# Altium PCB Arduino_Display_PCB1.PcbDoc
Units mil, origin at the board's own origin, x right, y up, seen from the top; angles counter-clockwise.
Board outline 2395 x 2300 mil, 2 copper layers (Top Layer, Bottom Layer); 41 components, 52 nets, 169 pads, 56 vias.
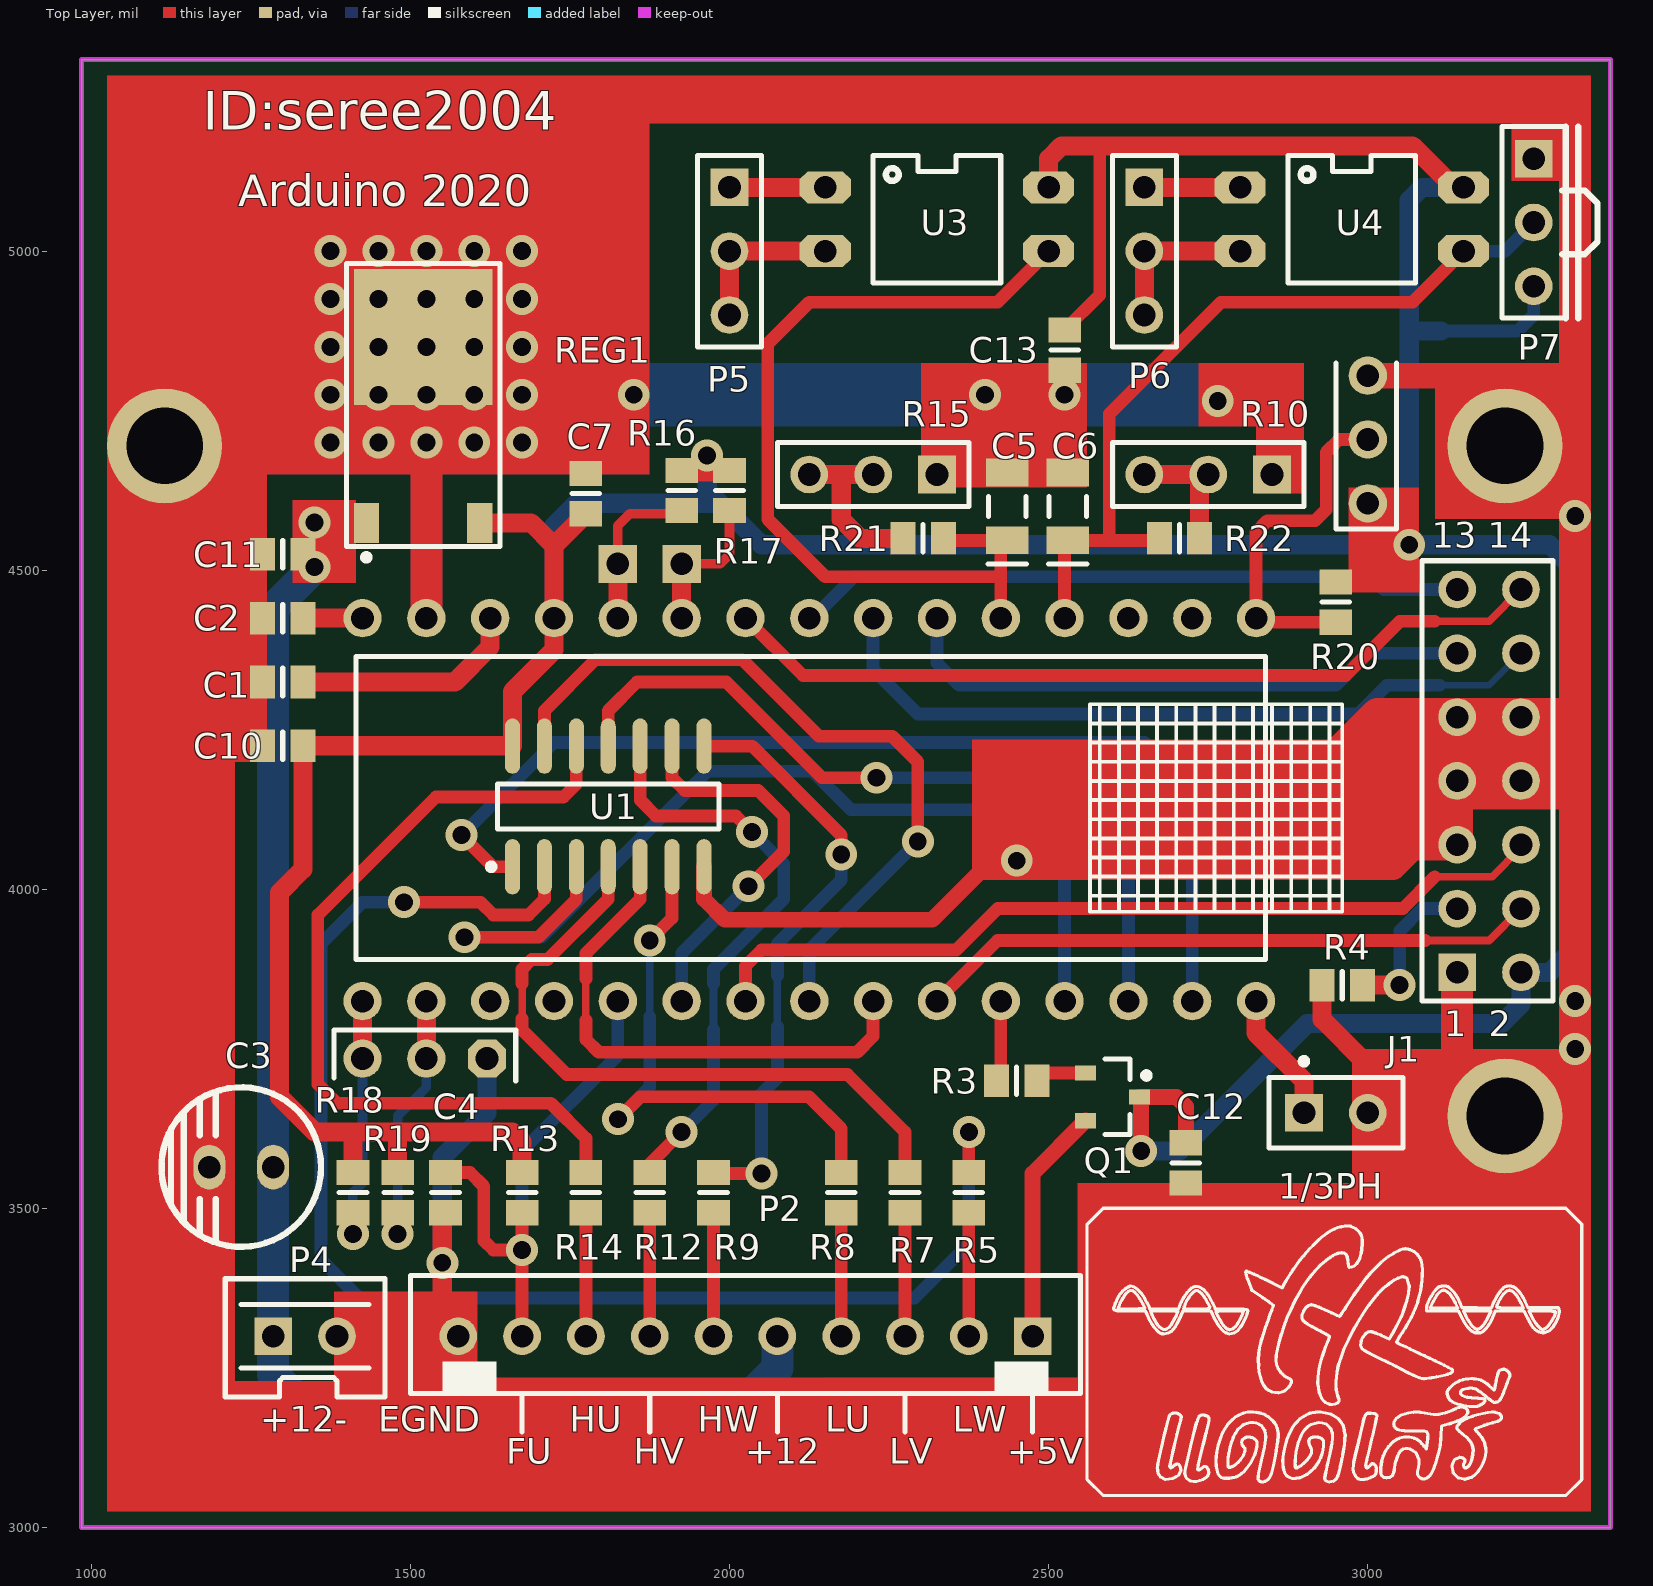
[diagram p0: Top Layer view]
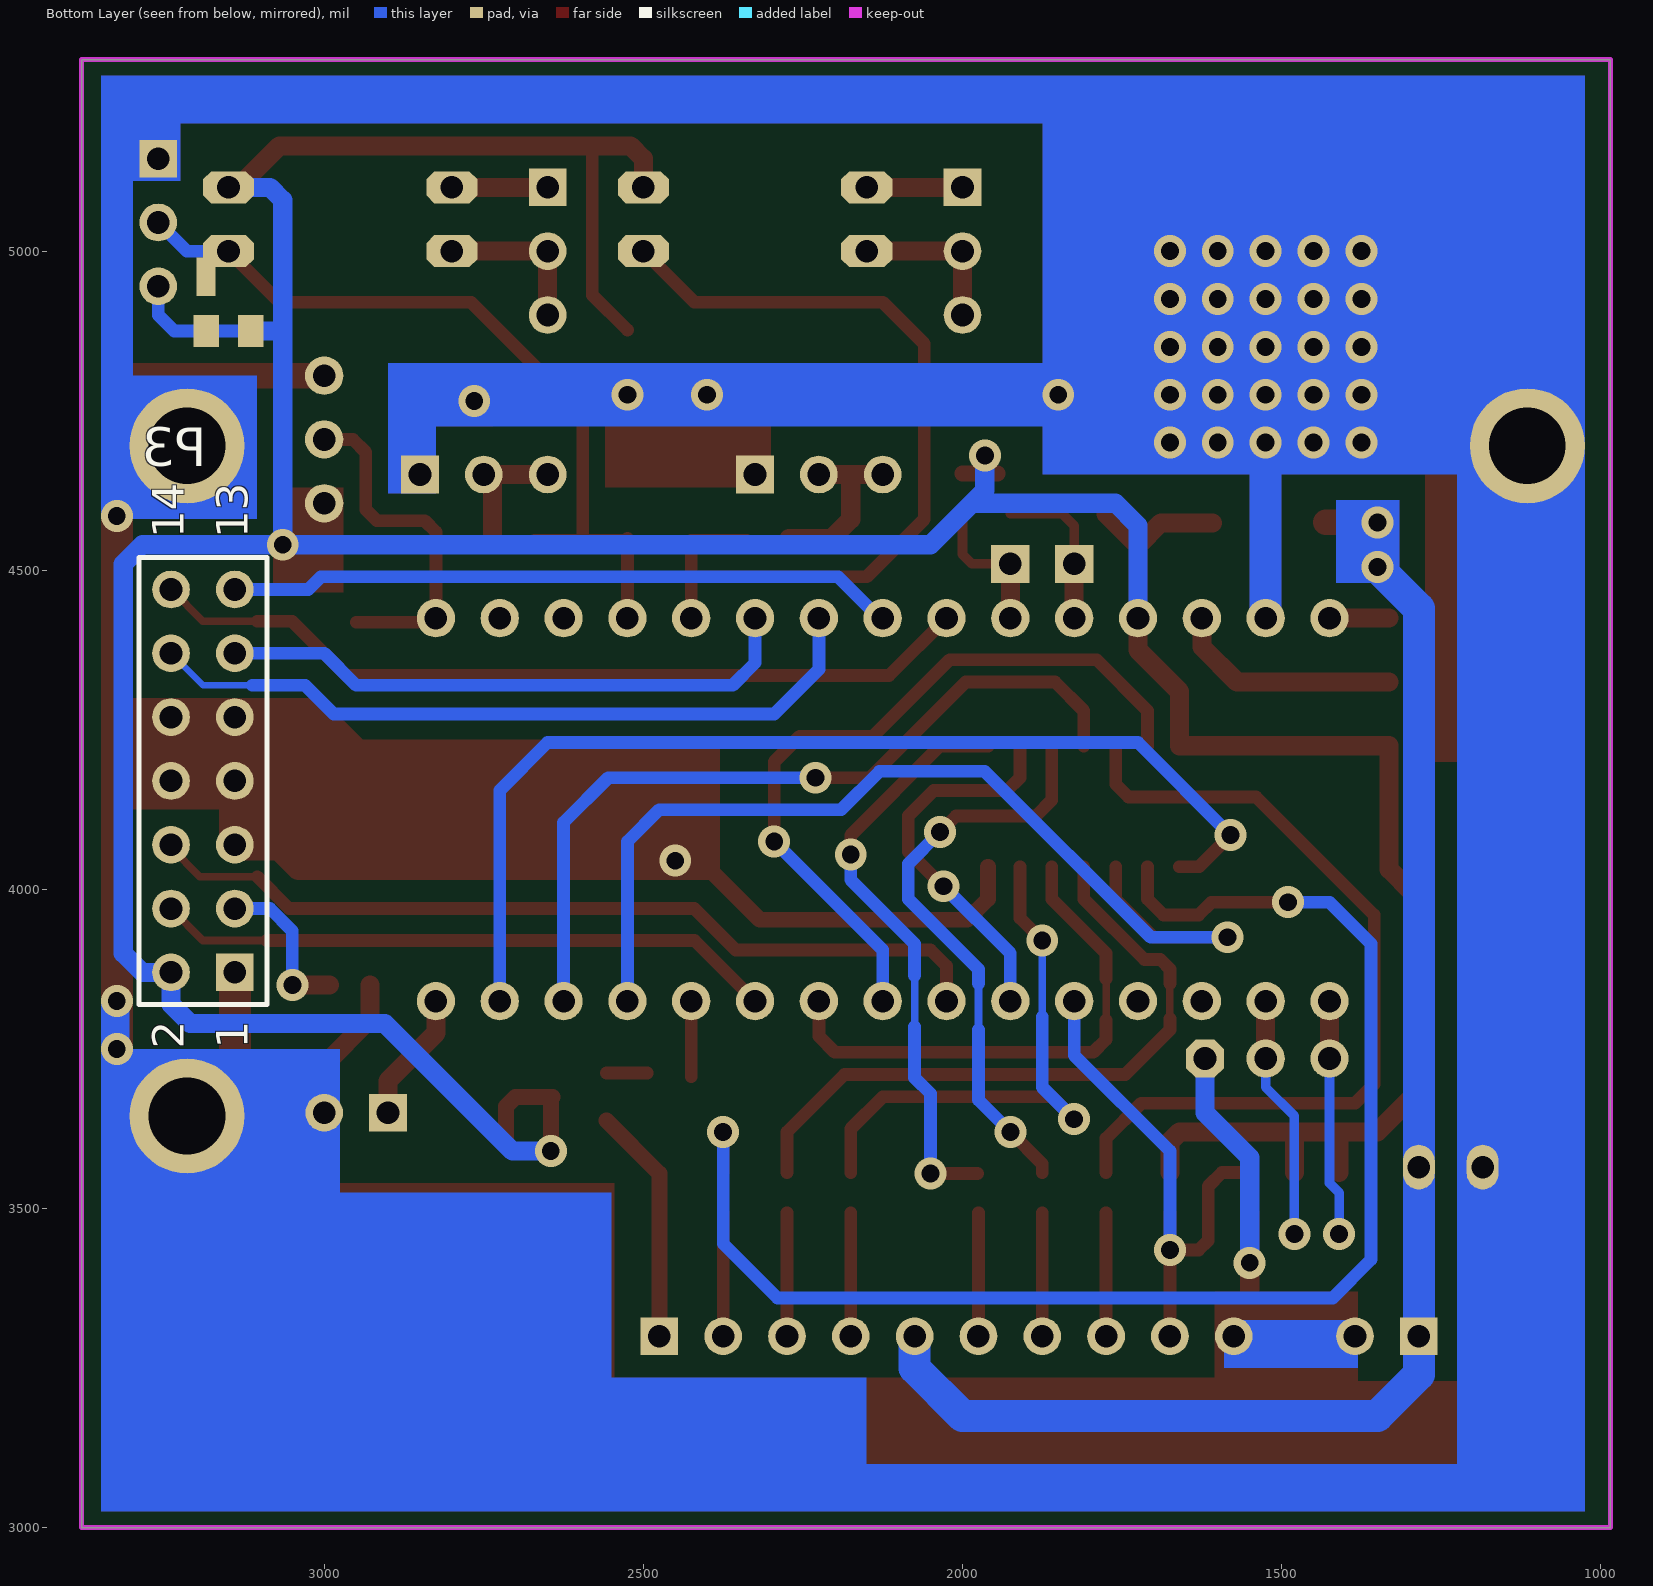
[diagram p1: Bottom Layer view, seen from below]

## Layer stack, top to bottom
Top Solder: solder mask 0.4, Solder Resist, Dk 3.5
Top Layer: signal copper 1.4
Dielectric 1: dielectric 12.6, FR-4, Dk 4.8
Bottom Layer: signal copper 1.4
Bottom Solder: solder mask 0.4, Solder Resist, Dk 3.5

## Board outline
985,3000 3380,3000 3380,5300 985,5300

## Design rules (kind name [scope] priority, off if disabled: settings)
Clearance [All] p1: gap=10
PolygonConnect [All] p1: connectstyle=Direct reliefconductorwidth=10 reliefentries=4 polygonreliefangle="90 Angle" airgapwidth=10
RoutingVias [All] p1: holewidth=28 width=50 viastyle="Through Hole" minholewidth=28 minwidth=50 maxholewidth=28 maxwidth=50
SolderMaskExpansion [All] p1: expansion=4
UnpouredPolygon [All] p1: allowunpoured=FALSE
Width [All] p1: maxlimit=100 minlimit=10 preferedwidth=20 minimp=50.000000 maximp=50.000000 favimp=50.000000
29 further rules are at their usual default settings.

## Classes and differential pairs
component class Arduino_SPWM_Sheet1: C1 C2 C3 J1 P2 P4 Q1 R3 R4 R5 R7 R8 R9 R12 R13 R14

## Components (designator, comment, footprint, x,y, rotation, side; value= is the part's Value field where it differs from the comment)
C1 "10PF" 6-0805_L 1300,4325 r0 top
C2 "100nF" 6-0805_L 1300,4425 r180 top
C3 "100uF" CAN_100 1235,3565 r0 top
C4 "100nF" 6-0805_L 1555,3525 r270 top (schematic designator C2)
C5 "10uF/16" C1206 2435,4600 r90 top (schematic designator C2)
C6 "10uF/16" C1206 2530,4600 r90 top (schematic designator C2)
C7 "100nF" 6-0805_L 1775,4620 r270 top (schematic designator C2)
C10 "100nF" 6-0805_L 1300,4225 r180 top (schematic designator C2)
C11 "100nF" 6-0805_L 1300,4525 r180 top (schematic designator C2)
C12 "100nF" 6-0805_L 2715,3571.5 r90 top (schematic designator C2)
C13 "100nF" 6-0805_L 2525,4845 r270 top (schematic designator C2)
J1 "LED0" PIN2 2900,3650 r0 top (schematic designator D2)
P2 "Header 10" HDR1X10 2475,3300 r180 top
P3 "LCD" HDR2X7 3140,3870 r90 bottom
P4 "Header 2" HDR1X2 1285,3300 r0 top
P5 "Header 2" HDR1X3 2000,5100 r270 top (schematic designator P4)
P6 "Header 2" HDR1X3 2650,5100 r270 top (schematic designator P4)
P7 "Header 2" HDR1X3 3260,5145 r270 top (schematic designator P4)
Q1 "SS8050(Y1)" SOT23_L 2600,3675 r0 top
R3 "1K" 6-0805_L 2450,3700 r180 top
R4 "1.8K" 6-0805_L 2960,3850 r180 top (schematic designator R2)
R5 "220R" 6-0805_L 2375,3525 r90 top
R7 "220R" 6-0805_L 2275,3525 r90 top
R8 "220R" 6-0805_L 2175,3525 r90 top
R9 "220R" 6-0805_L 1975,3525 r90 top
R10 "VR50K" HDR1X3 2850,4650 r180 top
R12 "220R" 6-0805_L 1875,3525 r90 top
R13 "4.7K" 6-0805_L 1675,3525 r270 top
R14 "220R" 6-0805_L 1775,3525 r90 top
R15 "VR50K" HDR1X3 2325,4650 r180 top (schematic designator R10)
R16 "4.7K" 6-0805_L 1925,4625 r270 top (schematic designator R13)
R17 "4.7K" 6-0805_L 2000,4625 r270 top (schematic designator R13)
R18 "4.7K" 6-0805_L 1410,3525 r270 top (schematic designator R13)
R19 "4.7K" 6-0805_L 1480,3525 r270 top (schematic designator R13)
R20 "4.7K" 6-0805_L 2950,4450 r270 top (schematic designator R13)
R21 "68K" 6-0805_L 2303.5,4550 r180 top (schematic designator R13)
R22 "68K" 6-0805_L 2705,4550 r0 top (schematic designator R13)
REG1 "7805" TO-252-2 1520,4720 r0 top
U1 "74HC04" SO14_N 1810,4130 r90 top
U3 "EL817" OPTO4 2325,5050 r0 top
U4 "EL817" OPTO4 2975,5050 r0 top (schematic designator U3)

## Footprints (in the part's own frame and the unit in brackets; to place one, negate y for a bottom-side part, rotate by r counter-clockwise, add the part's x,y. Pads: shape width x height; smd on the part's side, far side on the other; paste and mask are expansions set on the pad)
6-0805_L [mm] "Chip Resistor, Body 2.0x1.2mm, IPC High Density"
  rect 1x1.3 smd: 1(-0.8,0) 2(0.8,0)
  silkscreen extent 0,-0.55 0,0.55, body extent -1.07,-0.7 1.07,0.7, height 0.7
C1206 [mm] "Chip Capacitor, Body 3.2x1.6mm, IPC High Density"
  rect 1.1x1.7 smd: 1(-1.35,0) 2(1.35,0)
  silkscreen extent -0.4,-0.75 0.4,0.75, body extent -1.7,-0.9 1.7,0.9, height 1.3
CAN_100 [mil]
  oval 50x70 hole 35.43: 1(50,0) 2(-50,0)
  silkscreen extent -125,-125 125,125
HDR1X2 [mm] "Connector; Header; 2 Position"
  rect 1.5x1.5 hole 0.9: 1(0,0)
  round 1.5 hole 0.9: 2(2.54,0)
  silkscreen extent -1.27,-1.27 3.81,1.27
HDR1X3 [mm] "Connector; Header; 3 Position"
  rect 1.5x1.5 hole 0.9: 1(0,0)
  round 1.5 hole 0.9: 2(2.54,0) 3(5.08,0)
  silkscreen extent -1.27,-1.27 6.35,1.27
HDR1X10 [mm] "Connector; Header; 10 Position"
  rect 1.5x1.5 hole 0.9: 1(0,0)
  round 1.5 hole 0.9: 2(2.54,0) 3(5.08,0) 4(7.62,0) 5(10.16,0) 6(12.7,0) 7(15.24,0) 8(17.78,0) 9(20.32,0) 10(22.86,0)
HDR2X7 [mm] "Connector; Header; 7x2 Position"
  rect 1.5x1.5 hole 0.9: 1(0,0)
  round 1.5 hole 0.9: 2(0,2.54) 3(2.54,0) 4(2.54,2.54) 5(5.08,0) 6(5.08,2.54) 7(7.62,0) 8(7.62,2.54) 9(10.16,0) 10(10.16,2.54) 11(12.7,0) 12(12.7,2.54) 13(15.24,0) 14(15.24,2.54)
  silkscreen extent -1.27,-1.27 16.51,3.81
OPTO4 [mil]
  oct 80x50 hole 35.43: 1(-175,50) 2(-175,-50) 3(175,-50) 4(175,50)
  silkscreen extent -100,-100 100,100
PIN2 [mm] "Photosensitive Diode; 2 Leads"
  rect 1.5x1.5 hole 0.9: 1(0,0)
  round 1.5 hole 0.9: 2(2.54,0)
  silkscreen extent -1.4,-1.4 3.94,2.17
SO14_N [mm]
  oval 2.2x0.6 smd: 1(-2.4,3.81) 2(-2.4,2.54) 3(-2.4,1.27) 4(-2.4,0) 5(-2.4,-1.27) 6(-2.4,-2.54) 7(-2.4,-3.81) 8(2.4,-3.81) 9(2.4,-2.54) 10(2.4,-1.27) 11(2.4,0) 12(2.4,1.27) 13(2.4,2.54) 14(2.4,3.81)
  silkscreen extent -2.52,-4.4 0.9,4.78
SOT23_L [mm] "SOT23, 3-Leads, Body 2.9x1.3mm, Pitch 0.95mm, Lead Span 2.3mm - Reverse Pinning, IPC High Density"
  rect 0.85x0.6 smd: 1(1.075,0) 2(-1.075,-0.95) 3(-1.075,0.95)
  silkscreen extent -0.3,-1.5 1.48,1.5, body extent -0.7,-1.5 0.7,1.5, height 1.1
TO-252-2 [mm]
  rect 1x1.6 smd: 1(-2.25,-3.7) 3(2.25,-3.7)
  rect 5.5x5.4 smd: 2(0,3.7)
  silkscreen extent -3.05,-5.2 3.05,6.62

## Part data
C1 C2 C4 C5 C6 C7 C10 C11 C12 C13: library part Cap, "Capacitor"
C3: library part "Cap Pol1", "Capacitor (Radial)"
J1: "Typical INFRARED GaAs LED"
P2: "Header, 10-Pin"
P4 P5 P6 P7: "Header, 2-Pin"
Q1: library part NPN, "NPN Bipolar Transistor"
R3 R4 R5 R7 R8 R9 R12 R13 R14 R16 R17 R18 R19 R20 R21 R22: library part Res1, "Resistor"
R10 R15: library part RPot, "Potentiometer"
U3 U4: library part Optoisolator1, "4-Pin Phototransistor Optocoupler"

## Free pads (board coordinates)
  round 60 hole 35.43: 0(1425,3735) 0(2825,3825) 0(3000,4805) 1(1525,3735) 1(2725,3825) 1(3000,4605) 2(2625,3825) 2(3000,4705) 3(2525,3825) 4(2425,3825) 5(2325,3825) 7(2825,4425) 8(2725,4425) 9(2625,4425) 10(2525,4425) 11(2425,4425) 12(2325,4425) 13(2225,4425) 14(2125,4425) 15(2025,4425) 16(1925,4425) 17(1825,4425) 18(1725,4425) 19(1625,4425) 20(1525,4425) 21(1425,4425) 22(1525,3825) 23(1625,3825) 24(1725,3825) 25(1825,3825) 26(1925,3825) 27(2025,3825) 28(2125,3825) 29(2225,3825) 30(1425,3825)
  rect 40x50 smd far side: 0(3185,4875) 1(3115,4875)
  round 180 hole 120: 0(3215,4695) 1(1115,4695) 2(3215,3645)
  rect 60x60 hole 35.43: 2(1825,4510) 3(1925,4510)
  rect 30x60 smd far side: 2(3185,4960)
  oct 60x60 hole 35.43: 3(1620,3735)

## Via types
v1: diameter 50, hole 28, Top Layer to Bottom Layer, 56 vias

## Nets (pads, with @x,y where several pads share a name; then routed paths per layer and width w, separated by ;. In a path a pad name is that pad's centre, name@x,y a point inside that pad or via, vN(x,y) a via of type N, cw(c..) or ccw(c..) an arc to the next point about the centre after c; other vN are vias at no path point)
+12V: C3.1 C11.1 P2.5 P4.1 REG1.1 | length 2271.6
  Top Layer w30: REG1.1@1430.75,4575 REG1.1
  Top Layer w40: v1(1350,4575) REG1.1@1430.75,4575
  Bottom Layer w50: v1(1350,4505) 1285,4440 C3.1 P4.1 1285,3240 1350,3175 2000,3175 2075,3250 P2.5
D3_1: 
D4_1: 
GND: C1.1 C2.2 C3.2 C4.2 C5.2 C6.2 C7.1 C10.2 C11.2 C12.1 C13.2 J1.2 P2.10 P3.1 P3.5 P3.7 P3.8 P3.9 P3.10 P4.2 P7.1 pad.0@3000,4805 pad.0@3215,4695 pad.1@1115,4695 pad.2@3215,3645 pad.3@1620,3735 pad.20 R4.2 R10.1 R15.1 REG1.2 U1.7 | length 2542
  Top Layer w20: 1263.5,4798.5 1295,4830 REG1.2@1484.33,4830
  Top Layer w25: U1.7 1960,3985 1992.5,3952.5 2317.5,3952.5 2400,4035
  Top Layer w30: 1550,3350 v1(1550,3415) C4.2@1550,3493.5 ; R4.2 2928.5,3796.5 3000,3725
  Top Layer w40: 3010,4035 3040,4035 3075,4070
  Top Layer w50: pad.20 v1(1525,4700) v1@1525,4715 ; 2952.5,4212.5 3015,4275 ; 2995,4070 P3.5 P3.7 ; 3140,3725 P3.1
  Bottom Layer w30: v1(1550,3415) 1550,3580 1620,3650 pad.3@1620,3735
  Bottom Layer w50: pad.20 v1(1525,4700)
  other v1: 3325,3750 3325,3825 2450,4045 3325,4585 1375,4700 1450,4700 1600,4700 1675,4700 2765,4765 1375,4775 1450,4775 1525,4775 1600,4775 1675,4775 1850,4775 2400,4775 2525,4775 1375,4850 1450,4850 1525,4850 1600,4850 1675,4850 1375,4925 1450,4925 1525,4925 1600,4925 1675,4925 1375,5000 1450,5000 1525,5000 1600,5000 1675,5000
Net*1_4: C4.1 P2.9 pad.25 R13.2 | length 865.8
  Top Layer w20: C4.1 1593.5,3556.5 1615,3535 1615,3450 1630,3435 v1(1675,3435) ; P2.9 v1(1675,3435) ; R13.2 v1(1675,3435)
  Bottom Layer w20: v1(1675,3435) 1675,3590 1825,3740 pad.25
Net*1_5: pad.26 U1.9 | length 606
  Top Layer w20: U1.9 1910,4175 1930,4155 2045,4155 2085,4115 2085,4059.29 2030.71,4005 v1(2030,4005)
  Bottom Layer w20: pad.26 1925,3900 v1(2030,4005)
Net*1_6: P3.6 pad.27 | length 1351.6
  Top Layer w10: P3.6@3240,4065 P3.6
  Top Layer w12: 3105,4020 3195,4020 P3.6@3240,4065
  Top Layer w20: pad.27 2025,3880 2050,3905 2355.21,3905 2420.21,3970 3055,3970 3105,4020
Net*1_7: pad.28 U1.13 | length 1185.3
  Top Layer w20: U1.13 1710,4280 1790,4360 2020,4360 2140,4240 2255,4240 2295,4200 v1(2295,4075)
  Bottom Layer w20: pad.28 2125,3905 v1(2295,4075)
Net*1_8: pad.29 U1.5 | length 829.4
  Top Layer w12: 1775,3795 1775,3860
  Top Layer w20: 1775,3795 1775,3765 1795,3745 2200,3745 2225,3770 pad.29 ; 1775,3860 1775,3900 1860,3985 U1.5
Net*1_9: P3.4 pad.5 | length 975.1
  Top Layer w12: 3090,3920 3190,3920 P3.4
  Top Layer w20: pad.5 2420,3920 3090,3920
Net*1_10: pad.4 R3.2 | length 118.5
  Top Layer w20: R3.2@2425,3706.5 pad.4
Net*1_11: pad.3@2525,3825 U1.3 | length 1593.9
  Top Layer w20: v1(1585,3925) 1700.5,3925 1760,3984.5 U1.3
  Bottom Layer w20: v1(1585,3925) 1705,3925 1965,4185 2130,4185 2190,4125 2475,4125 2525,4075 pad.3@2525,3825
Net*1_12: pad.2@2625,3825 U1.11 | length 1260.3
  Top Layer w20: U1.11 1810,4280 1855,4325 1995,4325 2145,4175 v1(2230,4175)
  Bottom Layer w20: v1(2230,4175) 2555,4175 2625,4105 pad.2@2625,3825
Net*1_13: pad.1@2725,3825 U1.1 | length 1666.6
  Top Layer w20: v1(1580,4085) 1629.49,4035.51 U1.1
  Bottom Layer w20: v1(1580,4085) 1725,4230 2650,4230 2725,4155 pad.1@2725,3825
Net*1_14: J1.1 pad.0@2825,3825 | length 206.1
  Top Layer w30: pad.0@2825,3825 2825,3775 2900,3700 J1.1
Net*1_15: pad.2@3000,4705 pad.7 R20.2 | length 541.3
  Top Layer w20: pad.7 2825,4560 2842.5,4577.5 2917.5,4577.5 2935,4595 2935,4685 2955,4705 pad.2@3000,4705 ; pad.7@2831.5,4418.5 R20.2
Net*1_18: C6.1 P7.2 pad.2@3185,4960 pad.10 R22.1 U4.3 | length 1252.8
  Top Layer w20: pad.10 C6.1@2525,4550 ; C6.1 2595,4546.85 ; R22.1@2670.35,4546.85 2595,4546.85 ; U4.3 3070,4920 2770,4920 2595,4745 2595,4546.85
  Bottom Layer w20: U4.3 3215,5000 P7.2
Net*1_19: C5.1 pad.11 R21.1 U3.3 | length 1386
  Top Layer w20: R21.1@2338.15,4546.85 2425,4546.85 2425,4490 ; pad.11 2425,4490 ; U3.3 2420,4920 2125,4920 2060,4855 2060,4580 2150,4490 2425,4490
Net*1_20: P3.11 pad.12 | length 925.2
  Bottom Layer w20: pad.12@2330,4425 pad.12 2325,4355 2360,4320 2950,4320 3000,4370 P3.11
Net*1_21: P3.12 pad.13 | length 1163.3
  Bottom Layer w10: 3112.89,4320 3190,4320 P3.12
  Bottom Layer w20: pad.13 2225,4345 2295,4275 2985,4275 3030,4320 3112.89,4320
Net*1_22: P3.13 pad.14 | length 1050.2
  Bottom Layer w20: pad.14 2130,4425 2195,4490 3005,4490 3025,4470 P3.13
Net*1_23: P3.14 pad.15 | length 1308.2
  Top Layer w12: 3105,4420 3190,4420 P3.14
  Top Layer w20: pad.15 2115,4335 2965,4335 3050,4420 3105,4420
Net*1_26: C7.2 C10.1 C12.2 C13.1 P3.2 P7.3 pad.0@3185,4875 pad.1@3000,4605 pad.1@3115,4875 pad.18 Q1.1 R13.1 R16.1 R17.1 R18.1 R19.1 R20.1 REG1.3 U1.14 U3.4 U4.4 | length 7521.3
  Top Layer w20: C13.1 2580,4931.5 2580,5165
  Top Layer w25: R16.1@1945,4651.5 R17.1@2000,4651.5 ; Q1.1 2700,3675 2715,3660 C12.2 ; v1(2645,3590) Q1.1@2645,3672.32
  Top Layer w30: R18.1 1410,3615 ; R19.1 1480,3615 ; REG1.3 1689.17,4574.33 1725,4538.5 ; U1.14 1660,4310 1725,4375 pad.18 1725,4538.5 ; U1.14@1660,4225 C10.1 1331.5,4031.5 1295,3995 1295,3675 1350,3620 1660,3620 1675,3605 R13.1 ; C7.2 1725,4538.5 ; U3.4 2500,5145 2520,5165 3070,5165 3135,5100 U4.4
  Bottom Layer w20: pad.1@3115,4875 3185,4875 3235,4875 3260,4900 P7.3
  Bottom Layer w30: pad.18 1725,4570 1760,4605 1985,4605 ; v1(1965,4680) 1965,4625 1985,4605 ; v1(2645,3590) 2705,3590 2905,3790 3210,3790 3240,3820 P3.2 3285,3870 3315,3900 3315,4510 3285,4540 v1(3065,4540) ; pad.1@3115,4875 3070,4875 3065,4880 ; U4.4 3085,5100 3065,5080 3065,4880 ; 1985,4605 2050,4540 v1(3065,4540) ; v1(3065,4540) 3065,4880
Net*1_27: C1.2 pad.19 | length 361.3
  Top Layer w30: C1.2 1570,4325 1625,4380 pad.19
Net*1_29: C2.1 pad.21 | length 93.5
  Top Layer w30: C2.1 pad.21
NetD1_1: 
NetD2_1: 
NetP1_3: P3.3 R4.1 | length 248
  Top Layer w30: R4.1 v1(3050,3850)
  Bottom Layer w20: v1(3050,3850) 3050,3935 3085,3970 P3.3
NetP1_15: 
NetP2_1: P2.1 Q1.2 | length 371.8
  Top Layer w25: P2.1 2475,3554.92 Q1.2
NetP2_2: P2.2 R5.1 | length 193.5
  Top Layer w20: P2.2 R5.1
NetP2_3: P2.3 R7.1 | length 193.5
  Top Layer w20: P2.3 R7.1
NetP2_4: P2.4 R8.1 | length 193.5
  Top Layer w20: P2.4 R8.1
NetP2_6: P2.6 R9.1 | length 193.5
  Top Layer w20: P2.6 R9.1
NetP2_7: P2.7 R12.1 | length 193.5
  Top Layer w20: P2.7 R12.1
NetP2_8: P2.8 R14.1 | length 193.5
  Top Layer w20: P2.8 R14.1
NetQ1_2: Q1.3 R3.1 | length 63.8
  Top Layer w20: R3.1@2493.9,3712.4 Q1.3
NetR5_2: R5.2 U1.2 | length 2254.6
  Top Layer w20: v1(1490,3980) 1610,3980 1630,3960 1685,3960 1710,3985 U1.2 ; R5.2 v1(2375,3620)
  Bottom Layer w20: v1(1490,3980) 1425,3980 1360,3915 1360,3420 1420,3360 2290,3360 2375,3445 v1(2375,3620)
NetR7_2: R7.2 U1.4 | length 1055.9
  Top Layer w12: 1675,3797.22 1675,3852.78
  Top Layer w20: 1675,3797.22 1675,3780 1745,3710 2185,3710 2275,3620 R7.2 ; 1675,3852.78 1675,3875 1690,3890 1715,3890 1810,3985 U1.4
NetR8_2: R8.2 U1.6 | length 891.5
  Top Layer w20: v1(1825,3640) 1860,3675 2125,3675 2175,3625 R8.2 ; v1(1875,3920) 1910,3955 U1.6
  Bottom Layer w10: v1(1825,3640) v1@1830,3635
  Bottom Layer w12: 1875,3800 v1(1875,3920)
  Bottom Layer w20: v1(1825,3640) 1875,3690 1875,3800
NetR9_2: R9.2 U1.8 | length 928.1
  Top Layer w20: U1.8 2035.51,4224.49 2175,4085 v1(2175,4055) ; R9.2@1976.5,3555 v1(2050,3555)
  Bottom Layer w12: 2075,3785 2075,3865
  Bottom Layer w20: v1(2050,3555) 2050,3680 2075,3705 2075,3785 ; 2075,3865 2075,3915 2175,4015 v1(2175,4055)
NetR12_2: R12.2 U1.10 | length 933.5
  Top Layer w20: U1.10 1860,4140 1885,4115 2010,4115 v1(2035,4090) 2035,4085 v1@2030,4080 ; R12.2 1875,3570 v1(1925,3620)
  Bottom Layer w12: 1975,3780 1975,3852.78
  Bottom Layer w20: v1(1925,3620) 1975,3670 1975,3780 ; 1975,3852.78 1975,3875 2085,3985 2085,4040 v1(2035,4090)
NetR14_2: R14.2 U1.12 | length 1323.1
  Top Layer w20: U1.12 1760,4165 1740,4145 1540,4145 1355,3960 1355,3695 1385,3665 1720,3665 1775,3610 R14.2
P5_1: 
P6_1: 
U3_1: P5.1 U3.1 | length 150
  Top Layer w30: P5.1 U3.1
U3_2: P5.2 P5.3 U3.2 | length 250
  Top Layer w30: P5.3 P5.2 U3.2
U3_3: R15.2 R15.3 R21.2 | length 279.4
  Top Layer w30: R15.3 2175,4650 ; R15.2 2175,4650 ; R21.2 2205,4550 2175,4580 2175,4650
U4_1: P6.1 U4.1 | length 150
  Top Layer w30: P6.1 U4.1
U4_2: P6.2 P6.3 U4.2 | length 250
  Top Layer w30: P6.3 P6.2 U4.2
U4_3: R10.2 R10.3 R22.2 | length 185.6
  Top Layer w30: R10.3 2735,4650 2736.5,4648.5 R22.2
VCC: 
pads on no net: R16.2 R17.2 R18.2 R19.2
copper on no net: | length 1237.3
  Top Layer w15: 1825,4510 1825,4570 1843.5,4588.5 1925,4588.5 ; 1925,4510.15 1985.15,4510.15 2000,4525 2000,4593.5
  Top Layer w30: 1425,3735 1425,3825 ; 1525,3735 1525,3825 ; 1825,4425 1825,4505 ; 1925,4425 1925,4510.15
  Bottom Layer w15: v1(1410,3460) 1410,3525 1425,3540 1425,3590 1425,3735 ; v1(1480,3460) 1480,3645 1525,3690 1525,3735

## Polygon pours and split planes (outlines as drawn)
no net on Top Overlay "Bottom Layer-No Net" (hatched 90Degree grid 30 track 6, remove dead copper): 2960,3965 2565,3965 2565,4290 2960,4290

## Keep-outs
Keep-Out Layer:
  the board outline again, w8
  text "Double Side PCB" at 3525,4865 h100
  text "Size 2.40 x 2.30 Inch" at 3525,4615 h100
  text "FR4 1.6 mm. Double Side" at 3525,4315 h100
  text "Top OverLay = White" at 3525,4065 h100
  text "Top-Bottom Solder Mask = Blue" at 3525,3790 h100
  text "Bottom OverLay = Non" at 3550,3565 h100

## Other copper
Top Layer:
  rectangle net GND: 3225,5110 3300,5200
  rectangle net GND: 1025,4650 1875,5275
  rectangle net GND: 3020,4125 3300,4300
  rectangle net GND: 3105,4580 3300,4825
  rectangle net GND: 3300,3025 3350,5200
  rectangle net GND: 2975,3100 3300,3750
  rectangle net GND: 2825,4620 2900,4725
  rectangle net GND: 2300,4630 2560,4825
  rectangle net GND: 1025,3025 1225,4690
  rectangle net GND: 1225,4200 1275,4690
  rectangle net GND: 1225,3025 3300,3100
  rectangle net GND: 2380,4015 3025,4235
  rectangle net GND: 1875,5200 3350,5275
  rectangle net GND: 2545,3100 2975,3540
  rectangle net GND: 1380,3100 1605,3370
  rectangle net GND: 1220,3100 1380,3230
  rectangle net GND: 3020,4095 3120,4125
  rectangle net GND: 3000,4225 3030,4255
  rectangle net GND: 2735,4725 2900,4825
  rectangle net +12V: 1315,4480 1415,4610
  rectangle net GND: 1605,3100 2545,3235
  rectangle net Net*1_26: 2970,4465 3080,4630
  rectangle net GND: 3010,4785 3105,4825
Bottom Layer:
  rectangle net GND: 3225,5110 3305,5200
  rectangle net GND: 3305,3750 3350,3830
  rectangle net GND: 1380,3250 1590,3325
  rectangle net GND: 2825,4620 2900,4725
  rectangle net GND: 1850,4725 2900,4825
  rectangle net GND: 2975,3025 3350,3750
  rectangle net GND: 2550,3025 2975,3525
  rectangle net GND: 1025,3025 2550,3100
  rectangle net GND: 1025,3100 1225,4650
  rectangle net GND: 1025,4650 1875,5275
  rectangle net GND: 1875,5200 3350,5275
  rectangle net GND: 3105,4580 3350,4805
  rectangle net +12V: 1315,4480 1415,4610
  rectangle net GND: 3300,4800 3350,5200
  rectangle net GND: 2150,3100 2550,3235

## Silkscreen, mask and mechanical layers (free items; w line width, h text height)
Top Overlay:
  drawing of 996 lines, arcs and shapes, not listed
  text "ID:seree2004" at 1175,5190 h60
  text "Arduino 2020" at 1230,5070 h50
  text "13 14" at 3100,4535 h40
  text "1  2" at 3120,3770 h40
  text "1/3PH" at 2860,3515 h40
  text "+12-" at 1265,3150 h40
  text "EGND" at 1450,3150 h40
  text "HU" at 1750,3150 h40
  text "HW" at 1950,3150 h40
  text "LU" at 2150,3150 h40
  text "LW" at 2350,3150 h40
  text "FU" at 1650,3100 h40
  text "HV" at 1850,3100 h40
  text "+12" at 2025,3100 h40
  text "LV" at 2250,3100 h40
  text "+5V" at 2435,3100 h40

## Dimensions
985,3000 to 985,5300 on Keep-Out Layer
985,5300 to 3380,5300 on Keep-Out Layer

## Text inside footprints (layer, text, board x,y; h text height)
P3: Bottom Overlay "2" at 3220,3750 h50 r270; Bottom Overlay "1" at 3120,3750 h50 r270; Bottom Overlay "14" at 3220,4550 h50 r270; Bottom Overlay "13" at 3120,4550 h50 r270